# Altium PCB DCSupplyHub-v2_20231205a.PcbDoc
Units mm, origin at the board's own origin, x right, y up, seen from the top; angles counter-clockwise.
Board outline 81.6 x 57 mm, 2 copper layers (Top Layer, Bottom Layer), stack 1 mm thick; 112 components, 60 nets, 389 pads, 146 vias.
Unrouted connection lines stored in the file: 178.
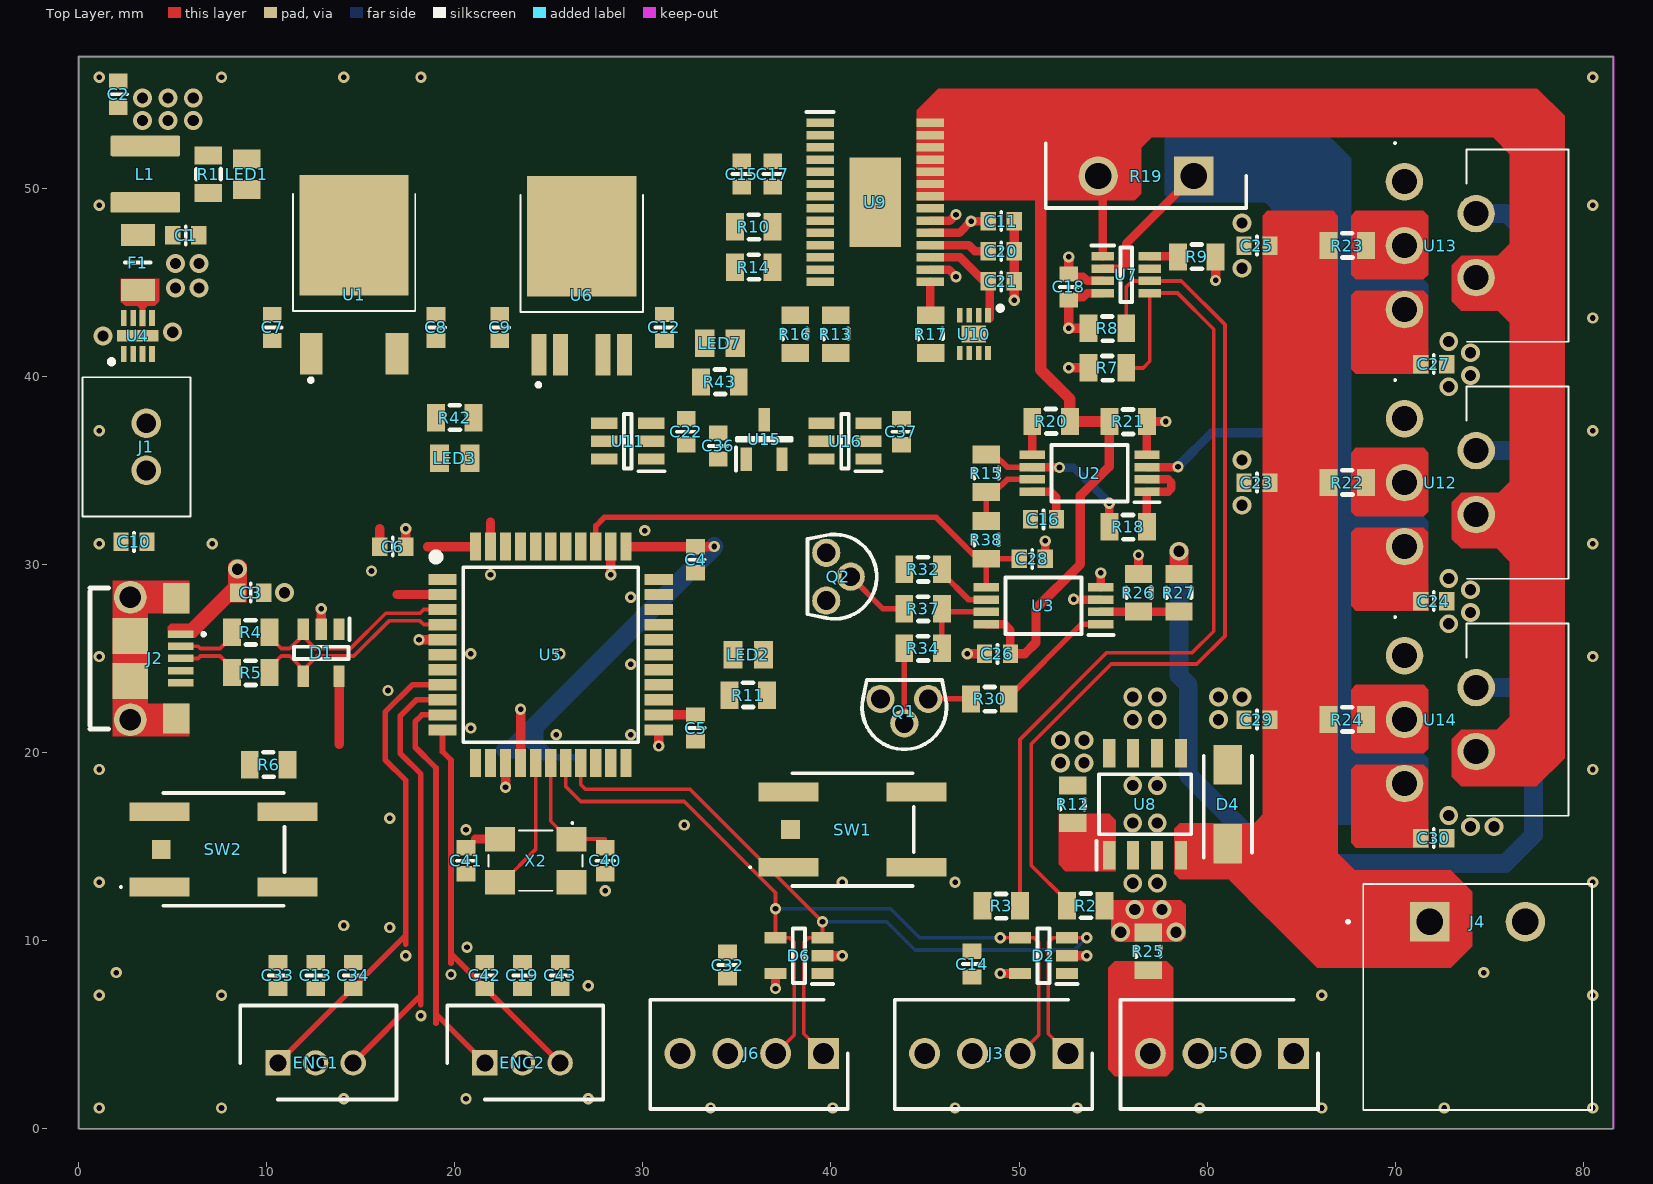
[diagram p0: Top Layer view]
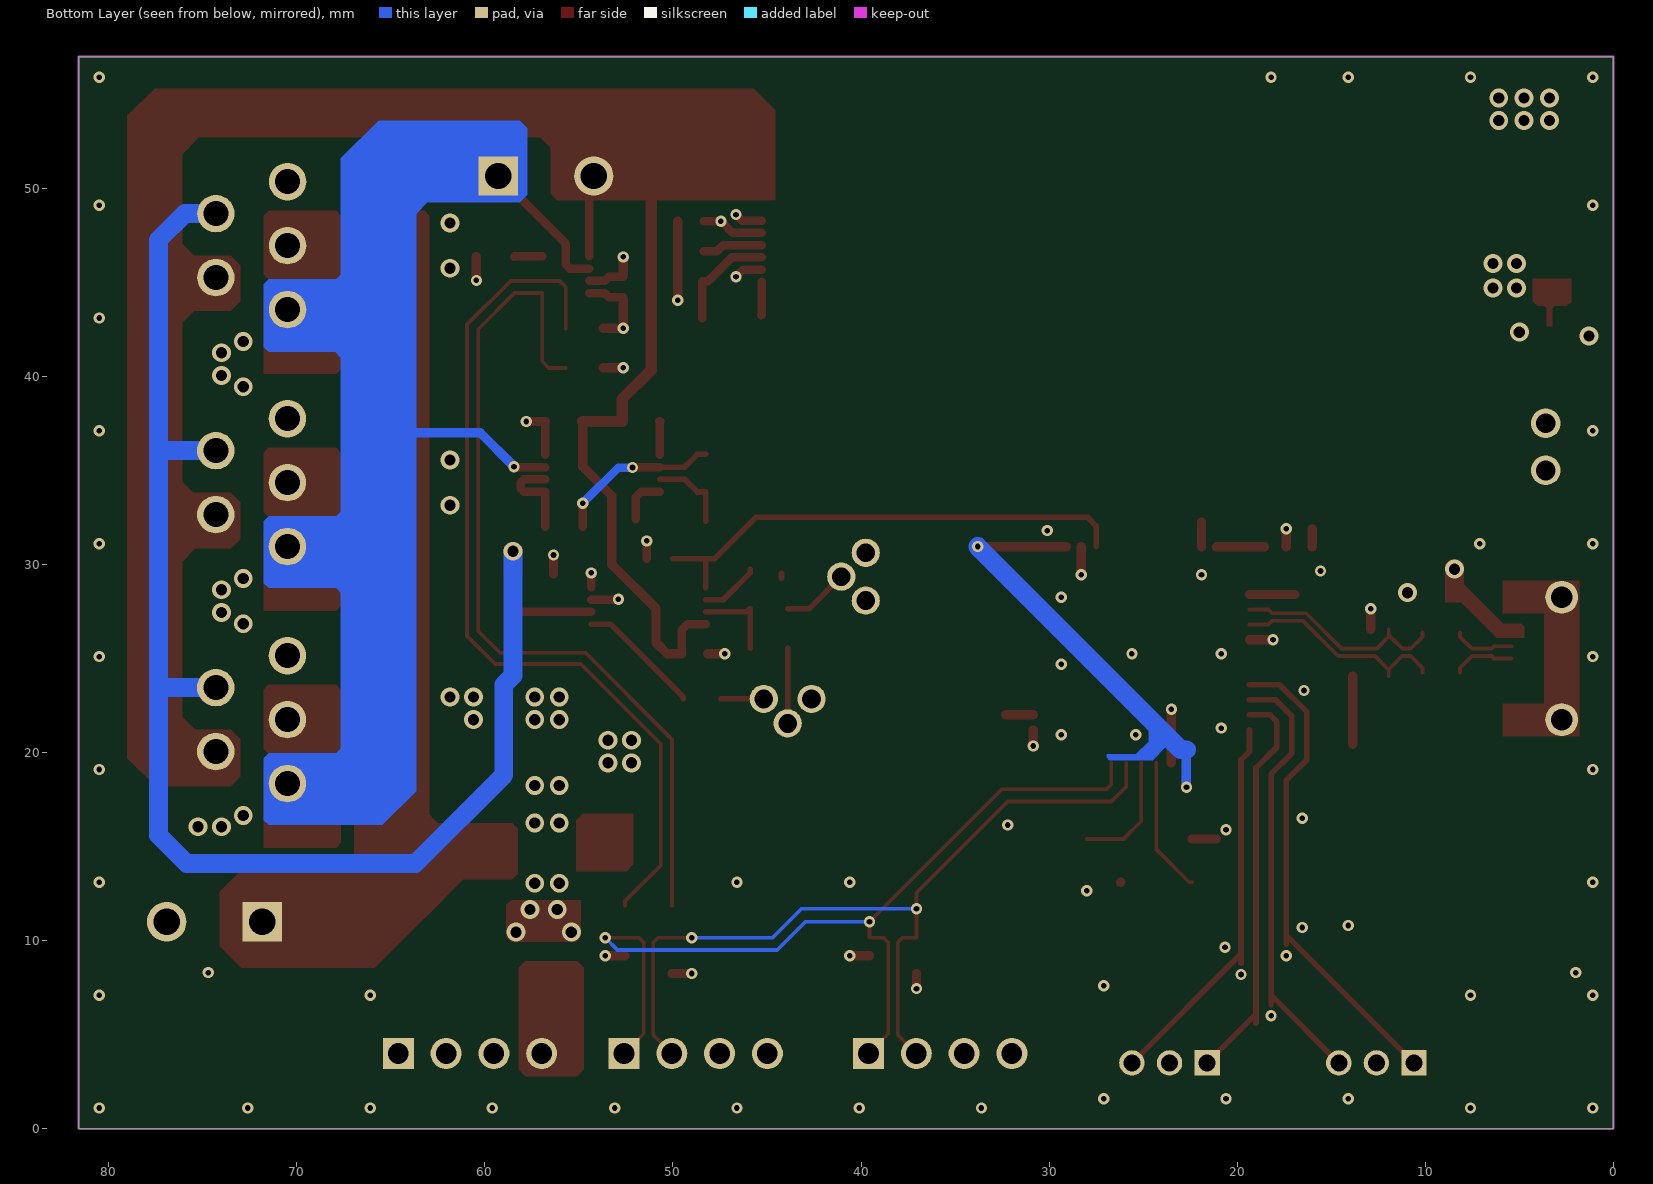
[diagram p1: Bottom Layer view, seen from below]

## Layer stack, top to bottom
Top Solder: solder mask 0.05, Solder Resist, Dk 4
Top Layer: signal copper 0.1
Dielectric 1: dielectric 0.8, FR-4, Dk 4.8
Bottom Layer: signal copper 0.1
Bottom Solder: solder mask 0.05, Solder Resist, Dk 4

## Board outline
0,0 81.6,0 81.6,57 0,57

## Design rules (kind name [scope] priority, off if disabled: settings)
AcuteAngle [All] p1: minimum=6.00000000000000E+0001 checktracksonly=FALSE
Clearance poly [InPolygon] p1: gap=0.3 ignorepadtopadclearanceinfootprint=TRUE
Clearance [All] p2: gap=0.2 ignorepadtopadclearanceinfootprint=TRUE
ComponentClearance [All] p1 off: gap=0.254 collisioncheckmode=3 verticalgap=0.254 showdistances=FALSE
HoleSize [All] p1: absolutevalues=TRUE maxlimit=20 minlimit=0.15 maxpercent=80.000 minpercent=20.000
MinimumAnnularRing [All] p1: minimumring=0.125
MinimumSolderMaskSliver [All] p1: minsoldermaskwidth=0.1
PlaneConnect [All] p1: planeconnectstyle=Direct reliefexpansion=0.508 reliefentries=4 reliefconductorwidth=0.254 reliefairgap=0.254
PolygonConnect [All] p1: connectstyle=Direct reliefconductorwidth=0.254 reliefentries=4 polygonreliefangle="90 Angle" airgapwidth=0.254
RoutingVias [All] p1: holewidth=0.3 width=0.6 viastyle="Through Hole" minholewidth=0.2 minwidth=0.45 maxholewidth=10 maxwidth=5
SMDNeckDown [All] p1 off: percent=50.000
SilkToSolderMaskClearance [IsPad] p1: minsilkscreentomaskgap=0 clearancetoexposedcopper=TRUE
SolderMaskExpansion [All] p1: expansion=0.05 istentingtop=FALSE
UnRoutedNet [All] p1: checkbadconnections=TRUE
Width [All] p1: maxlimit=5 minlimit=0.1 preferedwidth=0.2 bottomlayer_minwidth=0.15 minimp=50.000000 maximp=50.000000 favimp=50.000000
24 further rules are at their usual default settings.

## Classes and differential pairs
component class VCONV-DAC: C11 C15 C17 C20 C21 C22 C36 C37 R10 R13 R14 R16 R17 U9 U10 U11 U15 U16
component class PWM-DAC-PSU: C16 C18 C23 C24 C25 C26 C27 C28 C29 C30 D4 Q1 Q2 R7 R8 R9 R12 R15 R18 R19 R20 R21 R22 R23 R24 R26 R27 R30 R32 R34 R37 R38 U2 U3 U7 U8 U12 U13 U14
component class output&ext-modules: C13 C14 C19 C32 C33 C34 C42 C43 D2 D6 ENC1 ENC2 J3 J4 J5 J6 R25

## Components (designator, comment, footprint, x,y, rotation, side; value= is the part's Value field where it differs from the comment)
C1 "Cap" CAP_0603 5.7,47.5 r0 top value=100nF
C2 "Cap" CAP_0603 2.1,55 r90 top value=100nF
C3 "Cap" CAP_0603 9.15,28.5 r180 top value=100nF
C4 "Cap" CAP_0603 32.8,30.25 r90 top value=100nF
C5 "Cap" CAP_0603 32.8,21.3 r90 top value=100nF
C6 "Cap" CAP_0603 16.7,30.95 r0 top value=100nF
C7 "Cap" CAP_0603 10.3,42.6 r270 top value=100nF
C8 "Cap" CAP_0603 19,42.6 r90 top value=22uF
C9 "Cap" CAP_0603 22.4,42.6 r270 top value=100nF
C10 "Cap" CAP_0603 2.95,31.2 r180 top value=100nF
C11 "Cap" CAP_0603 49.05,48.25 r0 top value=10uF
C12 "Cap" CAP_0603 31.15,42.6 r270 top value=10uF
C13 "Cap" CAP_0603 12.6,8.15 r90 top value=100nF
C14 "Cap" CAP_0603 47.5,8.75 r90 top value=100nF
C15 "Cap" CAP_0603 35.25,50.75 r90 top value=10uF
C16 "Cap" CAP_0603 51.3,32.4 r180 top value=100nF
C17 "Cap" CAP_0603 36.9,50.75 r90 top value=10uF
C18 "Cap" CAP_0603 52.65,44.75 r90 top value=0.1uF
C19 "Cap" CAP_0603 23.6,8.15 r90 top value=100nF
C20 "Cap" CAP_0603 49.05,46.65 r0 top value=10uF
C21 "Cap" CAP_0603 49.05,45.05 r0 top value=2u2
C22 "Cap" CAP_0603 32.3,37.05 r270 top value=100nF
C23 "Cap" CAP_0603 62.65,34.35 r0 top value=10uF
C24 "Cap" CAP_0603 72.05,28.05 r0 top value=100nF
C25 "Cap" CAP_0603 62.65,46.95 r0 top value=10uF
C26 "Cap" CAP_0603 48.85,25.25 r0 top value=100nF
C27 "Cap" CAP_0603 72.05,40.65 r0 top value=100nF
C28 "Cap" CAP_0603 50.7,30.3 r0 top value=1uF
C29 "Cap" CAP_0603 62.65,21.75 r0 top value=10uF
C30 "Cap" CAP_0603 72.05,15.45 r0 top value=100nF
C32 "Cap" CAP_0603 34.5,8.7 r90 top value=100nF
C33 "Cap" CAP_0603 10.6,8.15 r90 top value=100nF
C34 "Cap" CAP_0603 14.6,8.15 r90 top value=100nF
C36 "Cap" CAP_0603 34,36.3 r90 top value=22uF
C37 "Cap" CAP_0603 43.75,37.05 r270 top value=100nF
C40 "Cap" CAP_0603 28,14.25 r90 top value=22pF
C41 "Cap" CAP_0603 20.6,14.25 r270 top value=22pF
C42 "Cap" CAP_0603 21.6,8.15 r90 top value=100nF
C43 "Cap" CAP_0603 25.6,8.15 r90 top value=100nF
D1 "CM1223-02SO" SOT95P280X145-5N 12.9,25.3 r270 top
D2 "CM1223-02SO" SOT95P280X145-5N 51.3,9.2 r180 top
D4 "SK33A_R3G" DIOM5126X250N 61.1,17.25 r90 top
D6 "CM1223-02SO" SOT95P280X145-5N 38.3,9.2 r180 top
ENC1 "440054-3" SHDR3W50P0X200_1X3_800X470X635P 10.6,3.5 r0 top
ENC2 "440054-3" SHDR3W50P0X200_1X3_800X470X635P 21.6,3.5 r0 top
F1 "0685P9500-01" FUSC3216X83N 3.15,46.05 r90 top
J1 "B2B-XH-2__LF__SN_" B2BXH2LFSN 3.6,35 r90 top
J2 "2013499-1" 2013499-1 0.6,25 r270 top
J3 "61900411121" SHDR4W64P0X254_1X4_1020X580X1175P 52.6,4 r180 top
J4 "1757242" 1757242 71.839,11 r0 top
J5 "61900411121" SHDR4W64P0X254_1X4_1020X580X1175P 64.6,4 r180 top
J6 "61900411121" SHDR4W64P0X254_1X4_1020X580X1175P 39.6,4 r180 top
L1 "74404042330" "WE-LQS 4018" 3.55,50.75 r90 top value=33µH
LED1 "Check Fuse" LED_SMD_0805_R 8.95,50.75 r270 top
LED2 "YELLOW" LED_SMD_0805_R 35.6,25.2 r180 top
LED3 "BLUE" LED_SMD_0805_R 20,35.65 r180 top
LED7 "GREEN" LED_SMD_0805_R 34.1,41.75 r180 top
Q1 "2N3904" LM431ACZ 43.9,22.2 r180 top
Q2 "2N3904" LM431ACZ 40.4,29.35 r270 top
R1 "Res1" RES_0805 6.9,50.75 r180 top value=18k
R2 "Res1" RES_0805 53.55,11.85 r270 top value=4.7k
R3 "Res1" RES_0805 49.05,11.85 r90 top value=4.7k
R4 "Res1" RES_0805 9.15,26.4 r90 top value=22R
R5 "Res1" RES_0805 9.15,24.25 r90 top value=22R
R6 "Res1" RES_0805 10.1,19.35 r270 top value=10k
R7 "Res1" RES_0805 54.7,40.45 r90 top value=10R
R8 "Res1" RES_0805 54.7,42.55 r90 top value=10R
R9 "Res1" RES_0805 59.45,46.35 r270 top value=10R
R10 "Res1" RES_0805 35.9,47.95 r90 top value=1.25k
R11 "Res1" RES_0805 35.6,23.05 r270 top value=65R
R12 "Res1" RES_0805 52.85,17.25 r0 top value=50R
R13 "Res1" RES_0805 40.25,42.25 r180 top value=240R
R14 "Res1" RES_0805 35.9,45.8 r270 top value=10k
R15 "Res1" RES_0805 48.25,34.85 r180 top value="18k 0.1%"
R16 "Res1" RES_0805 38.1,42.25 r0 top value=10k
R17 "Res1" RES_0805 45.3,42.25 r0 top value=33.3k
R18 "Res1" RES_0805 55.8,32 r90 top value="18k 0.1%"
R19 "PWR221T-30-1R00F" TO508P343X1041X1930-2P 56.75,50.65 r180 top
R20 "Res1" RES_0805 51.7,37.6 r270 top value="18k 0.1%"
R21 "Res1" RES_0805 55.8,37.6 r90 top value="18k 0.1%"
R22 "Res1" RES_0805 67.45,34.35 r270 top value=10mR
R23 "Res1" RES_0805 67.45,46.95 r270 top value=10mR
R24 "Res1" RES_0805 67.45,21.75 r270 top value=10mR
R25 "Res1" RES_0805 56.873,9.427 r0 top value=20R
R26 "Res1" RES_0805 56.35,28.5 r180 top value="1k 0.1%"
R27 "Res1" RES_0805 58.5,28.5 r0 top value="14k 0.1%"
R30 "Res1" RES_0805 48.45,22.85 r90 top value=1k
R32 "Res1" RES_0805 44.9,29.75 r90 top value=10k
R34 "Res1" RES_0805 44.9,25.55 r90 top value=1k
R37 "Res1" RES_0805 44.9,27.65 r90 top value=10k
R38 "Res1" RES_0805 48.25,31.3 r180 top value=1k
R42 "Res1" RES_0805 20,37.8 r270 top value=150R
R43 "Res1" RES_0805 34.1,39.7 r270 top value=65R
SW1 "EVQQ2D03W" EVQQ2D03W 41.15,15.9 r0 top
SW2 "EVQQ2D03W" EVQQ2D03W 7.7,14.85 r0 top
U1 "TLE4274DV50ATMA2" IPD90N06S4L03 14.65,44.7 r0 top
U2 "LM358FV-GE2" SOP65P640X135-8N 53.75,34.85 r180 top
U3 "LM358FV-GE2" SOP65P640X135-8N 51.3,27.8 r180 top
U4 "LTC4365CDDB#PBF" SON50P200X300X80-9N-D 3.15,42.15 r90 top
U5 "ATMEGA32U4-AU" QFP80P1200X1200X120-44N 25.1,25.2 r0 top
U6 "TLS850D0TEV33ATMA1" BTS6143D 26.75,44.55 r0 top
U7 "INA232BIDDFR" SOT65P280X110-8N 55.7,45.4 r0 top
U8 "LM334M_NOPB" SOIC127P600X175-8N 56.7,17.25 r90 top
U9 "LTC3649IFE#PBF" SOP65P640X120-29N 42.35,49.25 r0 top
U10 "MAX5395NATA+T" SON50P200X200X80-9N-D 47.6,42.25 r270 top
U11 "MCP4726" SOT95P270X145-6N 29.2,36.55 r180 top
U12 "LT3080ET#31PBF" LT3080ET31PBF 72.4,34.35 r270 top
U13 "LT3080ET#31PBF" LT3080ET31PBF 72.395,46.95 r270 top
U14 "LT3080ET#31PBF" LT3080ET31PBF 72.4,21.75 r270 top
U15 "MAX6018AEUR18+T" SOT95P237X112-3N 36.45,36.65 r90 top
U16 "MCP4726" SOT95P270X145-6N 40.75,36.55 r180 top
X2 "ABM3C-16.000MHZ-D4Y-T" ABM3C16000MHZD4YT 24.3,14.25 r180 top

## Footprints (in the part's own frame and the unit in brackets; to place one, negate y for a bottom-side part, rotate by r counter-clockwise, add the part's x,y. Pads: shape width x height; smd on the part's side, far side on the other; paste and mask are expansions set on the pad)
1757242 [mm]
  rect 2.1x2.1 hole 1.4: 1(0,0)
  round 2.1 hole 1.4: 2(5.08,0)
  silkscreen extent -4.4,-10 8.62,2, body extent -3.58,-10 8.58,2, height 8.89
2013499-1 [mm]
  rect 0.4x1.35 smd: 1(-1.3,4.825) 2(-0.65,4.825) 3(0,4.825) 4(0.65,4.825) 5(1.3,4.825)
  rect 1.6x1.4 smd: 6(-3.2,4.6) 7(3.2,4.6)
  rect 1.9x1.9 smd: 8(-1.2,2.15) 9(1.2,2.15)
  round 1.75 hole 1.15: 10(-3.255,2.15) 11(3.255,2.15)
  silkscreen extent -3.75,0 3.75,6.09, body extent -3.97,-0.56 4.03,5.04, height 2.68
ABM3C16000MHZD4YT [mm]
  rect 1.6x1.3 smd: 1(-1.9,-1.15) 2(1.9,-1.15) 3(1.9,1.15) 4(-1.9,1.15)
  silkscreen extent -2.5,-2.05 2.5,1.6, body extent -2.57,-1.67 2.57,1.67, height 1.4
B2BXH2LFSN [mm]
  round 1.575 hole 1.05: 1(0,0) 2(2.5,0)
  silkscreen extent -2.45,-2.35 4.95,3.4, body extent -2.45,-3.36 4.95,3.39, height 7.01
BTS6143D [mm]
  rect 0.8x2.2 smd: 1(-2.28,-3.4) 2(-1.14,-3.4) 4(1.14,-3.4) 5(2.28,-3.4)
  rect 5.8x6.4 smd: 3(0,2.9)
  silkscreen extent -3.25,-5.1 3.25,5.1, body extent -3.25,-4.49 3.25,5.49, height 2.45
CAP_0603 [mm]
  rect 0.81x0.99 smd: 1(-0.69,0) 2(0.69,0)
  silkscreen extent 0,-0.48 0,0.48, body extent -0.81,-0.41 0.81,0.41, height 0.95
DIOM5126X250N [mm]
  rect 2.1x1.5 smd: 1(-2.1,0) 2(2.1,0)
  silkscreen extent -2.85,-1.28 2.57,1.28, body extent -2.57,-1.28 2.57,1.28, height 2.5
EVQQ2D03W [mm]
  rect 3.2x1 smd: A1(-3.4,-2) A2(3.4,-2) B1(-3.4,2) B2(3.4,2)
  rect 1x1 smd: G1(-3.3,0)
  silkscreen extent -5.5,-3 3.25,3, body extent -3.3,-3 3.3,3, height 3.1
FUSC3216X83N [mm]
  rect 1.17x1.8 smd: 1(-1.47,0) 2(1.47,0)
  silkscreen extent 0,-0.69 0,0.69, body extent -1.6,-0.79 1.6,0.79, height 0.82
IPD90N06S4L03 [mm]
  rect 1.2x2.2 smd: 1(-2.28,-3.5) 3(2.28,-3.5)
  rect 5.8x6.4 smd: 2(0,2.8)
  silkscreen extent -3.25,-5 3.25,5, body extent -3.25,-4.47 3.25,5.48, height 2.3
LED_SMD_0805_R [mm]
  rect 1.02x1.47 smd: 1(-0.81,0) 2(0.81,0)
  body extent -1,-0.62 1,0.63, height 1.1
LM431ACZ [mm]
  round 1.5 hole 1: 1(-1.27,-0.65) 2(0,0.65) 3(1.27,-0.65)
  silkscreen extent -2.24,-1.65 2.24,2.03, body extent -2.66,-2.29 2.66,1.9, height 6.11
LT3080ET31PBF [mm]
  round 1.995 hole 1.33: 1(-3.4,-1.905) 2(-1.7,1.905) 3(0,-1.905) 4(1.7,1.905) 5(3.4,-1.905)
  silkscreen extent -5.5,-2.45 5.11,6.81, body extent -5.11,-2.47 5.11,6.81, height 15.85
QFP80P1200X1200X120-44N [mm]
  rect 1.5x0.6 smd: 1(-5.75,4) 2(-5.75,3.2) 3(-5.75,2.4) 4(-5.75,1.6) 5(-5.75,0.8) 6(-5.75,0) 7(-5.75,-0.8) 8(-5.75,-1.6) 9(-5.75,-2.4) 10(-5.75,-3.2) 11(-5.75,-4) 23(5.75,-4) 24(5.75,-3.2) 25(5.75,-2.4) 26(5.75,-1.6) 27(5.75,-0.8) 28(5.75,0) 29(5.75,0.8) 30(5.75,1.6) 31(5.75,2.4) 32(5.75,3.2) 33(5.75,4)
  rect 0.6x1.5 smd: 12(-4,-5.75) 13(-3.2,-5.75) 14(-2.4,-5.75) 15(-1.6,-5.75) 16(-0.8,-5.75) 17(0,-5.75) 18(0.8,-5.75) 19(1.6,-5.75) 20(2.4,-5.75) 21(3.2,-5.75) 22(4,-5.75) 34(4,5.75) 35(3.2,5.75) 36(2.4,5.75) 37(1.6,5.75) 38(0.8,5.75) 39(0,5.75) 40(-0.8,5.75) 41(-1.6,5.75) 42(-2.4,5.75) 43(-3.2,5.75) 44(-4,5.75)
  silkscreen extent -6.3,-4.65 4.65,5.4, body extent -6,-6 6,6, height 1.2
RES_0805 [mm]
  rect 1.45x0.95 smd: 1(0,-1) 2(0,1)
  silkscreen extent -0.66,-0.27 0.64,0.27, body extent -0.63,-1.02 0.63,1.03, height 0.5
SHDR3W50P0X200_1X3_800X470X635P [mm]
  rect 1.35x1.35 hole 0.9: 1(0,0)
  round 1.35 hole 0.9: 2(2,0) 3(4,0)
  silkscreen extent -2,-1.95 6.3,3.05, body extent -1.91,-1.6 6.09,3.1, height 6.05
SHDR4W64P0X254_1X4_1020X580X1175P [mm]
  rect 1.65x1.65 hole 1.1: 1(0,0)
  round 1.65 hole 1.1: 2(2.54,0) 3(5.08,0) 4(7.62,0)
  silkscreen extent -1.29,-2.85 9.21,2.95, body extent -1.29,-2.9 8.91,2.9, height 11.75
SOIC127P600X175-8N [mm]
  rect 1.525x0.65 smd: 1(-2.712,1.905) 2(-2.712,0.635) 3(-2.712,-0.635) 4(-2.712,-1.905) 5(2.712,-1.905) 6(2.712,-0.635) 7(2.712,0.635) 8(2.712,1.905)
  silkscreen extent -3.47,-2.45 1.6,2.58, body extent -3,-2.45 3,2.45, height 1.75
SON50P200X200X80-9N-D [mm]
  rect 0.75x0.3 smd: 1(-1,0.75) 2(-1,0.25) 3(-1,-0.25) 4(-1,-0.75) 5(1,-0.75) 6(1,-0.25) 7(1,0.25) 8(1,0.75)
  rect 0.9x1.3 smd: 9(0,0)
  silkscreen extent -1.5,1.28 -1.25,1.53, body extent -1.05,-1 1.05,1, height 0.8
SON50P200X300X80-9N-D [mm]
  rect 0.85x0.3 smd: 1(-0.95,0.75) 2(-0.95,0.25) 3(-0.95,-0.25) 4(-0.95,-0.75) 5(0.95,-0.75) 6(0.95,-0.25) 7(0.95,0.25) 8(0.95,0.75)
  rect 0.61x2.2 smd: 9(0,0)
  silkscreen extent -1.5,1.27 -1.25,1.52, body extent -1.05,-1.5 1.05,1.5, height 0.8
SOP65P640X120-29N [mm]
  rect 1.45x0.45 smd: 1(-2.925,4.225) 2(-2.925,3.575) 3(-2.925,2.925) 4(-2.925,2.275) 5(-2.925,1.625) 6(-2.925,0.975) 7(-2.925,0.325) 8(-2.925,-0.325) 9(-2.925,-0.975) 10(-2.925,-1.625) 11(-2.925,-2.275) 12(-2.925,-2.925) 13(-2.925,-3.575) 14(-2.925,-4.225) 15(2.925,-4.225) 16(2.925,-3.575) 17(2.925,-2.925) 18(2.925,-2.275) 19(2.925,-1.625) 20(2.925,-0.975) 21(2.925,-0.325) 22(2.925,0.325) 23(2.925,0.975) 24(2.925,1.625) 25(2.925,2.275) 26(2.925,2.925) 27(2.925,3.575) 28(2.925,4.225)
  rect 2.74x4.75 smd: 29(0,0)
  silkscreen extent -3.65,4.8 -2.2,4.8, body extent -3.2,-4.85 3.2,4.85, height 1.2
SOP65P640X135-8N [mm]
  rect 1.35x0.45 smd: 1(-3.05,0.975) 2(-3.05,0.325) 3(-3.05,-0.325) 4(-3.05,-0.975) 5(3.05,-0.975) 6(3.05,-0.325) 7(3.05,0.325) 8(3.05,0.975)
  silkscreen extent -3.72,-1.5 2.03,1.55, body extent -3.2,-1.5 3.2,1.5, height 1.35
SOT65P280X110-8N [mm]
  rect 1.2x0.45 smd: 1(-1.25,0.975) 2(-1.25,0.325) 3(-1.25,-0.325) 4(-1.25,-0.975) 5(1.25,-0.975) 6(1.25,-0.325) 7(1.25,0.325) 8(1.25,0.975)
  silkscreen extent -1.85,-1.45 0.3,1.55, body extent -1.4,-1.45 1.4,1.45, height 1.1
SOT95P237X112-3N [mm]
  rect 1.25x0.6 smd: 1(-1.05,0.95) 2(-1.05,-0.95) 3(1.05,0)
  silkscreen extent -1.68,-1.46 0.08,1.5, body extent -1.27,-1.46 1.27,1.46, height 1
SOT95P270X145-6N [mm]
  rect 1.4x0.6 smd: 1(-1.25,0.95) 2(-1.25,0) 3(-1.25,-0.95) 4(1.25,-0.95) 5(1.25,0) 6(1.25,0.95)
  silkscreen extent -1.95,-1.45 0.2,1.6, body extent -1.35,-1.45 1.35,1.45, height 1.45
SOT95P280X145-5N [mm]
  rect 1.15x0.6 smd: 1(-1.25,0.95) 2(-1.25,0) 3(-1.25,-0.95) 4(1.25,-0.95) 5(1.25,0.95)
  silkscreen extent -1.83,-1.45 0.33,1.5, body extent -1.4,-1.45 1.4,1.45, height 1.45
TO508P343X1041X1930-2P [mm]
  rect 2.085x2.085 hole 1.39: 1(-2.54,0)
  round 2.085 hole 1.39: 2(2.54,0)
  silkscreen extent -5.33,-1.73 5.33,1.7, body extent -5.21,-1.73 5.21,1.7, height 18.8
"WE-LQS 4018" [mm] "SMD Power Inductor, 2-Leads, Body 4.0x4.0mm"
  rrect15% 1.1x3.7 smd: 1(-1.5,0) 2(1.5,0)
  body extent -2,-2 2,2, height 1.78

## Part data
C1 C2 C3 C4 C5 C6 C7 C8 C9 C10 C11 C12 C13 C14 C15 C16 C17 C18 C19 C20 C21 C22 C23 C24 C25 C26 C27 C28 C29 C30 C32 C33 C34 C36 C37 C40 C41 C42 C43: "Capacitor", LatestRevisionDate=17-Jul-2002, LatestRevisionNote="Re-released for DXP Platform.", PackageDescription="Radial Cap, Thru-Hole; 2 Leads; 0.3 in Pin Spacing", PackageReference=RAD-0.3, Published=8-Jun-2000, Publisher="Altium Limited"
D1 D2 D6: "TVS Diode (Uni-directional)", Manufacturer_Name=onsemi, Mouser Part Number=748-CM1223-02SO, ComponentLink1Description=Datasheet, ComponentLink1URL=https://www.onsemi.com/pdf/datasheet/cm1223-d.pdf, Datasheet Link=https://www.onsemi.com/pdf/datasheet/cm1223-d.pdf, Height=1.45mm, Manufacturer_Part_Number=CM1223-02SO, Mouser Price/Stock=https://www.mouser.co.uk/ProductDetail/onsemi/CM1223-02SO?qs=lLuKAerq7nnvVg3rEtIojA%3D%3D
D4: "Schottky Diode", Manufacturer_Name="Taiwan Semiconductor", Manufacturer_Part_Number="SK33A R3G", Mouser Part Number=821-SK33AR3G, Datasheet Link=https://eu.mouser.com/datasheet/2/395/SK32A%20SERIES_T1705-1140381.pdf, Height=2.5mm, Mouser Price/Stock=https://www.mouser.co.uk/ProductDetail/Taiwan-Semiconductor/SK33A-R3G?qs=u4fy%2FsgLU9MRgnm6RX6lAA%3D%3D
ENC1 ENC2: "Connector", Manufacturer_Name="TE Connectivity", Mouser Part Number=571-440054-3, Arrow Part Number=440054-3, Arrow Price/Stock=https://www.arrow.com/en/products/440054-3/te-connectivity?region=nac, ComponentLink1Description="Encoder Datasheet", ComponentLink1URL=https://www.farnell.com/datasheets/3750970.pdf, Datasheet Link=https://www.te.com/commerce/DocumentDelivery/DDEController?Action=srchrtrv&DocNm=440054&DocType=Customer+Drawing&DocLang=English&DocFormat=pdf&PartCntxt=440054-3, Height=6.35mm, Manufacturer_Part_Number=440054-3, Mouser Price/Stock=https://www.mouser.co.uk/ProductDetail/TE-Connectivity/440054-3?qs=JFPmFzpscO5ATC%252BmN3ka1Q%3D%3D
F1: "Fuse Chip Fast Acting 50A 32V SMD Solder Pad 1206 3.2 X 1.58 X 0.63mm Ceramic T/R", Manufacturer_Name="Bel Circuit Protection", Arrow Part Number=0685P9500-01, Arrow Price/Stock=https://www.arrow.com/en/products/0685p9500-01/bel-group?region=europe, Datasheet Link=https://www.arrow.com/en/products/0685p9500-01/bel-group, Geometry.Height=0.83mm, Manufacturer_Part_Number=0685P9500-01
J1: "Connector", Arrow Part Number="B2B-XH-2 (LF)(SN)", Manufacturer_Name="JST (JAPAN SOLDERLESS TERMINALS)", Arrow Price/Stock=https://www.arrow.com/en/products/b2b-xh-2-lf-sn/jst-manufacturing?region=europe, Datasheet Link=http://uk.rs-online.com/web/p/products/1755297, Height=7mm, Manufacturer_Part_Number="B2B-XH-2 (LF)(SN)"
J2: "Connector", Manufacturer_Name="TE Connectivity", Mouser Part Number=571-2013499-1, Arrow Part Number=2013499-1, Arrow Price/Stock=https://www.arrow.com/en/products/2013499-1/te-connectivity?region=nac, ComponentLink1Description=Datasheet, ComponentLink1URL=https://cdn.amphenol-cs.com/media/wysiwyg/files/documentation/datasheet/inputoutput/io_usb_micro.pdf, Datasheet Link=http://www.te.com/commerce/DocumentDelivery/DDEController?Action=showdoc&DocId=Customer+Drawing%7F2013499%7FB2%7Fpdf%7FEnglish%7FENG_CD_2013499_B2.pdf%7F2013499-1, Manufacturer_Part_Number=2013499-1, Mouser Price/Stock=https://www.mouser.co.uk/ProductDetail/TE-Connectivity/2013499-1?qs=TL6PIybY3BOLK37GbUYdng%3D%3D
J3 J5 J6: "Connector", Manufacturer_Name="Wurth Elektronik", Mouser Part Number=710-61900411121, Datasheet Link=https://katalog.we-online.de/em/datasheet/6190xx11121.pdf, Height=11.75mm, Manufacturer_Part_Number=61900411121, Mouser Price/Stock=https://www.mouser.co.uk/ProductDetail/Wurth-Elektronik/61900411121?qs=W%252B2sBeLta1Z79%252BA04MeSCQ%3D%3D
  J3 J6: ComponentLink1Description="LCD Datasheet", ComponentLink1URL=https://www.farnell.com/datasheets/3708797.pdf
  J5: ComponentLink1Description="USB A", ComponentLink1URL=https://www.te.com/usa-en/product-1932258-1.datasheet.pdf
J4: "Connector", Manufacturer_Name="Phoenix Contact", Mouser Part Number=651-1757242, Arrow Part Number=1757242, Arrow Price/Stock=https://www.arrow.com/en/products/1757242/phoenix-contact?region=nac, ComponentLink1Description=Datasheet, ComponentLink1URL=http://www.phoenixcontact.com/de/produkte/1757242/pdf, Datasheet Link=http://www.phoenixcontact.com/de/produkte/1757242/pdf, Height=8.72mm, Manufacturer_Part_Number=1757242, Mouser Price/Stock=https://www.mouser.co.uk/ProductDetail/Phoenix-Contact/1757242?qs=uD%2FdkN7XIa3Ejiz9qDxlzw%3D%3D
L1: library part CMP-006-00018-3, "WE-LQS SMD Power Inductor, L=33 µH", Tolerance=20%, ComponentLink1Description="Manufacturer URL", ComponentLink1URL=http://www.we-online.com, ComponentLink2Description=Datasheet, ComponentLink2URL=http://katalog.we-online.de/pbs/datasheet/74404042330.pdf, Pins=2
LED1 LED2 LED3 LED7: library part LED2, "Typical RED, GREEN, YELLOW, AMBER GaAs LED", LatestRevisionDate=17-Jul-2002, LatestRevisionNote="Re-released for DXP Platform.", PackageDescription="SM LED; 2 Flat Leads", PackageReference=3.2X1.6X1.1, PackageVersion=Feb-2002, Published=8-Jun-2000, Publisher="Altium Limited"
Q1 Q2: library part 2N3904BU, "Transistor BJT NPN", Manufacturer_Name=onsemi, Mouser Part Number=512-2N3904BU, Arrow Part Number=2N3904BU, Arrow Price/Stock=https://www.arrow.com/en/products/2n3904bu/on-semiconductor?region=europe, ComponentLink1Description=Datasheet, ComponentLink1URL=http://www.onsemi.com/pub/Collateral/2N3904-D.pdf, Datasheet Link=http://www.onsemi.com/pub/Collateral/2N3904-D.pdf, Height=5.33mm, Manufacturer_Part_Number=2N3904BU, Mouser Price/Stock=https://www.mouser.co.uk/ProductDetail/onsemi-Fairchild/2N3904BU?qs=or4AE2qAS%252Bd0Jdpn%2F8ktKg%3D%3D
R1 R2 R3 R4 R5 R6 R7 R8 R9 R10 R11 R12 R13 R14 R15 R16 R17 R18 R20 R21 R22 R23 R24 R25 R26 R27 R30 R32 R34 R37 R38 R42 R43: "Resistor", LatestRevisionDate=17-Jul-2002, LatestRevisionNote="Re-released for DXP Platform.", PackageDescription="Axial Device, Thru-Hole; 2 Leads; 0.3 in Pin Spacing", PackageReference=AXIAL-0.3, Published=8-Jun-2000, Publisher="Altium Limited"
R19: "Shunt resistor", Manufacturer_Name=Bourns, Mouser Part Number=652-PWR221T-30-1R00F, Arrow Part Number=PWR221T-30-1R00F, Arrow Price/Stock=https://www.arrow.com/en/products/pwr221t-30-1r00f/bourns, ComponentLink1Description=Datasheet, ComponentLink1URL=https://www.mouser.com/datasheet/2/54/pwr221t-30-777826.pdf, Datasheet Link=https://www.mouser.com/datasheet/2/54/pwr221t-30-777826.pdf, Height=3.43mm, Manufacturer_Part_Number=PWR221T-30-1R00F, Mouser Price/Stock=https://www.mouser.co.uk/ProductDetail/Bourns/PWR221T-30-1R00F?qs=XYAu1o%252BHdOJGOBAldPrG1w%3D%3D
SW1 SW2: library part SW-SPST-2_C, "FSMSM Push Button Switch, 50 mA, -35 to 85 degC, 2-Pin SMD, RoHS, Tape and Reel", Case\/Package=SMD/SMT, Contact Current Rating=50mA, Contact Resistance=100mOhm, Manufacturer="TE Connectivity", Max Operating Temperature=85degC, Max Voltage Rating (DC)=12V, Min Operating Temperature=-35degC, Operating Force=180gf, Package Description="2-Pin Surface Mount Device, Body 6 x 3.5 mm, Pitch 9.19 mm", Package Quantity=1800, Package Reference=FSMSMTR, Voltage Rating (DC)=24V, Actuator Length=1.07mm, Actuator Material=Polyamide, ComponentLink1Description=Datasheet, ComponentLink1URL=https://www.farnell.com/datasheets/2244072.pdf, Contact Material=Brass, Contact Plating=Silver, Current Rating=50mA, Datasheet URL=http://www.te.com/commerce/DocumentDelivery/DDEController?Action=showdoc&DocId=Customer+Drawing%7F1437566-3%7FC2%7Fpdf%7FEnglish%7FENG_CD_1437566-3_C2_1437566_3_1_c.dwg.pdf%7F1437566-4, Datasheet Version="Rev. C2, 08/2014", Electrical Life=20000Cycles, ELV=Compliant, Illumination Type=Illuminated, Lead Free=LeadFree, Manufacturer URL=http://www.te.com/, Mechanical Life=20000Cycles, Mount=SurfaceMount, Mounting Technology=SurfaceMount, Orientation=Straight, Packaging=TapeandReel, REACH SVHC=Unknown, RoHSCompliant=true, Switch Travel=0.25mm, Termination=GullWing, Throw Configuration=SPST
U1: "LDO, FIXED, 5V, 0.4A, -40 TO 150DEG C", Manufacturer_Name=Infineon, Mouser Part Number=726-TLE4274DV50ATMA2, Arrow Part Number=TLE4274DV50ATMA2, Arrow Price/Stock=https://www.arrow.com/en/products/tle4274dv50atma2/infineon-technologies-ag?region=nac, ComponentLink1Description=Datasheet, ComponentLink1URL=https://www.mouser.com/datasheet/2/196/Infineon-TLE4274-DS-v01_70-EN-1133217.pdf, Datasheet Link=https://www.mouser.com/datasheet/2/196/Infineon-TLE4274-DS-v01_70-EN-1133217.pdf, Height=2mm, Manufacturer_Part_Number=TLE4274DV50ATMA2, Mouser Price/Stock=https://www.mouser.co.uk/ProductDetail/Infineon-Technologies/TLE4274DV50ATMA2/?qs=IxCaM9nJKKWmxkR9ksyK2Q%3D%3D
U2: library part TI-LM358-8, "l Operational Amplifier", ComponentLink1Description=Datasheet, ComponentLink1URL=https://www.ti.com/lit/ds/symlink/lm358.pdf?ts=1699359399522&ref_url=https%253A%252F%252Fwww.ti.com%252Fproduct%252FLM358%253Futm_source%253Dgoogle%2526utm_medium%253Dcpc%2526utm_campaign%253Dasc-null-null-GPN_EN-cpc-evm-google-wwe_cons%2526utm_content%253DLM358%2526ds_k%253DLM358%2BDatasheet%2526DCM%253Dyes%2526gclid%253DEAIaIQobChMI5uKEhe-xggMVJz4GAB1MywkTEAAYASAAEgJG8PD_BwE%2526gclsrc%253Daw.ds
U3: library part TI-LM358-8, "l Operational Amplifier", Supplier Part Number 1=1716341, ComponentLink1Description=Datasheet, ComponentLink1URL=https://www.ti.com/lit/ds/symlink/lm358.pdf?ts=1699359399522&ref_url=https%253A%252F%252Fwww.ti.com%252Fproduct%252FLM358%253Futm_source%253Dgoogle%2526utm_medium%253Dcpc%2526utm_campaign%253Dasc-null-null-GPN_EN-cpc-evm-google-wwe_cons%2526utm_content%253DLM358%2526ds_k%253DLM358%2BDatasheet%2526DCM%253Dyes%2526gclid%253DEAIaIQobChMI5uKEhe-xggMVJz4GAB1MywkTEAAYASAAEgJG8PD_BwE%2526gclsrc%253Daw.ds, Supplier 1=Rs
U4: "vervoltage, Undervoltage and Reverse Supply Protection Controller", Manufacturer_Name="Analog Devices", Mouser Part Number=584-LTC4365CDDB#PBF, ComponentLink1Description=Datasheet, ComponentLink1URL=https://www.analog.com/media/en/technical-documentation/data-sheets/LTC4365.pdf, Datasheet Link=http://cds.linear.com/docs/en/datasheet/4365fa.pdf, Height=0.8mm, Manufacturer_Part_Number=LTC4365CDDB#PBF, Mouser Price/Stock=https://www.mouser.com/Search/Refine.aspx?Keyword=584-LTC4365CDDB%23PBF
U5: "MCU AVR 32K FLASH 16MHZ 44-TQFP Atmel ATMEGA32U4-AU, 8bit AVR Microcontroller, 16MHz, 1 kB, 32 kB Flash, 44-Pin TQFP", Manufacturer_Name=Microchip, Mouser Part Number=556-ATMEGA32U4-AU, Arrow Part Number=ATMEGA32U4-AU, Arrow Price/Stock=https://www.arrow.com/en/products/atmega32u4-au/microchip-technology?region=nac, ComponentLink1Description=Datasheet, ComponentLink1URL=https://ww1.microchip.com/downloads/en/DeviceDoc/Atmel-7766-8-bit-AVR-ATmega16U4-32U4_Datasheet.pdf, Datasheet Link=http://www.atmel.com/images/atmel-7766-8-bit-avr-atmega16u4-32u4_summary.pdf, Geometry.Height=1.2mm, Manufacturer_Part_Number=ATMEGA32U4-AU, Mouser Price/Stock=https://www.mouser.co.uk/ProductDetail/Microchip-Technology/ATMEGA32U4-AU?qs=SSucg2PyLi7mKWjHIsNJ3w%3D%3D
U6: "LDO VOltage regulator", Manufacturer_Name=Infineon, Mouser Part Number=726-TLS850D0TEV33ATM, Arrow Part Number=TLS850D0TEV33ATMA1, Arrow Price/Stock=https://www.arrow.com/en/products/tls850d0tev33atma1/infineon-technologies-ag, ComponentLink1Description=Datasheet, ComponentLink1URL=https://4donline.ihs.com/images/VipMasterIC/IC/INFN/INFN-S-A0003268371/INFN-S-A0003268371-1.pdf?hkey=6D3A4C79FDBF58556ACFDE234799DDF0, Datasheet Link=https://www.arrow.com/en/products/tls850d0tev33atma1/infineon-technologies-ag, Height=2mm, Manufacturer_Part_Number=TLS850D0TEV33ATMA1, Mouser Price/Stock=https://www.mouser.co.uk/ProductDetail/Infineon-Technologies/TLS850D0TEV33ATMA1?qs=lJkB7%252BtQNiOAXKJxyf22ag%3D%3D
U7: "INA232 48-V, 16-Bit, Current, Voltage, and Power Monitor With an I2C Interface", Manufacturer_Name="Texas Instruments", Mouser Part Number=595-INA232BIDDFR, ComponentLink1Description=Datahseet, ComponentLink1URL=https://www.ti.com/lit/ds/symlink/ina232.pdf?HQS=dis-mous-null-mousermode-dsf-pf-null-wwe&ts=1700934645658&ref_url=https%253A%252F%252Fwww.mouser.com%252F, Datasheet Link=https://www.ti.com/lit/ds/symlink/ina232.pdf?ts=1699312390876&ref_url=https%253A%252F%252Fwww.ti.com%252Fproduct%252FINA232%253Futm_source%253Dgoogle%2526utm_medium%253Dcpc%2526utm_campaign%253Dasc-null-null-GPN_EN-cpc-pf-google-wwe_cons%2526utm_content%2, Height=1.1mm, Manufacturer_Part_Number=INA232BIDDFR, Mouser Price/Stock=https://www.mouser.co.uk/ProductDetail/Texas-Instruments/INA232BIDDFR?qs=17ckDYBRdelmwH1njZdaQw%3D%3D
U8: "3-Terminal Adjustable Current Source", Arrow Part Number=LM334M/NOPB, Manufacturer_Name="Texas Instruments", Mouser Part Number=926-LM334M/NOPB, Arrow Price/Stock=https://www.arrow.com/en/products/lm334mnopb/texas-instruments?region=nac, ComponentLink1Description=Datasheet, ComponentLink1URL=https://www.ti.com/lit/ds/symlink/lm134.pdf?ts=1700986476311&ref_url=https%253A%252F%252Fwww.google.com%252F, Datasheet Link=http://www.ti.com/lit/ds/symlink/lm334.pdf, Height=1.75mm, Manufacturer_Part_Number=LM334M/NOPB, Mouser Price/Stock=https://www.mouser.co.uk/ProductDetail/Texas-Instruments/LM334M-NOPB?qs=X1J7HmVL2ZGVqL5LPYoDQw%3D%3D
U9: "60V, 4A Synchronous Step-Down Regulator with Rail-to-Rail Programmable Output", Manufacturer_Name="Analog Devices", Mouser Part Number=584-LTC3649IFE#PBF, Supplier Part Number 1=LTC3649IFE#PBF-ND, Arrow Part Number=LTC3649IFE#PBF, Arrow Price/Stock=https://www.arrow.com/en/products/ltc3649ifepbf/linear-technology, ComponentLink1Description=Datasheet, ComponentLink1URL=https://www.analog.com/media/en/technical-documentation/data-sheets/3649fb.pdf, Datasheet Link=http://www.analog.com/media/en/technical-documentation/data-sheets/3649fb.pdf, Geometry.Height=1.2mm, Manufacturer_Part_Number=LTC3649IFE#PBF, Mouser Price/Stock=https://www.mouser.co.uk/ProductDetail/Analog-Devices/LTC3649IFEPBF?qs=oahfZPh6IALghjzowGYuFA%3D%3D, Supplier 1=Digi-Key
U10: "ingle, 256-Tap Volatile, I2C, Low-Voltage Linear / Taper Digital Potentiometer", Manufacturer_Name="Analog Devices", Mouser Part Number=700-MAX5395NATA+T, ComponentLink1Description=Datasheet, ComponentLink1URL=https://www.farnell.com/datasheets/2297485.pdf, Datasheet Link=https://datasheets.maximintegrated.com/en/ds/MAX5395.pdf, Height=0.8mm, Manufacturer_Part_Number=MAX5395NATA+T, Mouser Price/Stock=https://www.mouser.co.uk/ProductDetail/Analog-Devices-Maxim-Integrated/MAX5395NATA%2bT?qs=0JU57JYmZjt6U4d8%252BEwekw%3D%3D
U11 U16: library part MCP4725A0T-E_CH, "12-Bit Digital-to-Analog Converter with EEPROM Memory", Arrow Part Number=MCP4725A0T-E/CH, Manufacturer_Name=Microchip, Mouser Part Number=579-MCP4725A0TECH, Arrow Price/Stock=https://www.arrow.com/en/products/mcp4725a0t-ech/microchip-technology?region=nac, ComponentLink1Description=Datasheet, ComponentLink1URL=http://ww1.microchip.com/downloads/en/DeviceDoc/22039d.pdf, Datasheet Link=http://ww1.microchip.com/downloads/en/DeviceDoc/22039d.pdf, Height=1.45mm, Manufacturer_Part_Number=MCP4725A0T-E/CH, Mouser Price/Stock=https://www.mouser.co.uk/ProductDetail/Microchip-Technology/MCP4725A0T-E-CH?qs=vkMqrgFpRajeQECZ3goc0A%3D%3D
U12 U13 U14: "Adjustable 1.1A Single Resistor Low Dropout Regulator", Manufacturer_Name="Analog Devices", Mouser Part Number=584-LT3080ET#31PBF, Arrow Part Number=LT3080ET#31PBF, Arrow Price/Stock=https://www.arrow.com/en/products/lt3080et31pbf/analog-devices?region=nac, ComponentLink1Description=Datasheet, ComponentLink1URL=https://www.analog.com/media/en/technical-documentation/data-sheets/lt3080.pdf, Datasheet Link=https://www.analog.com/media/en/technical-documentation/data-sheets/3080fc.pdf, Height=15.748mm, Manufacturer_Part_Number=LT3080ET#31PBF, Mouser Price/Stock=https://www.mouser.co.uk/ProductDetail/Analog-Devices/LT3080ET31PBF?qs=hVkxg5c3xu%252BqtsodQH9qig%3D%3D
U15: "Precision, Micropower, 1.8V Supply, / Low-Dropout, SOT23 Voltage Reference", Manufacturer_Name="Analog Devices", Mouser Part Number=700-MAX6018AEUR18T, ComponentLink1Description=Datasheet, ComponentLink1URL=https://datasheets.maximintegrated.com/en/ds/MAX6018-MAX6018B.pdf, Datasheet Link=https://datasheets.maximintegrated.com/en/ds/MAX6018-MAX6018B.pdf, Height=1.12mm, Manufacturer_Part_Number=MAX6018AEUR18+T, Mouser Price/Stock=https://www.mouser.co.uk/ProductDetail/Maxim-Integrated/MAX6018AEUR18%2bT?qs=GxOUx7aO6nxTHpj7gtPQaw%3D%3D
X2: "16MHz Â±30ppm Crystal 18pF 50 Ohms 4-SMD, No Lead", Package="SMD-4 Abracon", Availability=Unavailable, ComponentLink1Description=Datasheet, ComponentLink1URL=https://www.mouser.ee/datasheet/2/3/abm3c-1775120.pdf, MF=Abracon, MP=ABM3C-16.000MHZ-D4Y-T, Price=None, SnapEDA_Link=https://www.snapeda.com/parts/ABM3C-16.000MHZ-D4Y-T/Abracon%20LLC/view-part/463692/?ref=snap, Supplier 1="Arrow Electronics", Supplier Part Number 1=ABM3C-16.000MHZ-D4Y-T

## Via types
v1: diameter 0.6, hole 0.3, Top Layer to Bottom Layer, 95 vias
v2: diameter 1, hole 0.6, Top Layer to Bottom Layer, 51 vias

## Nets (pads, with @x,y where several pads share a name; then routed paths per layer and width w, separated by ;. In a path a pad name is that pad's centre, name@x,y a point inside that pad or via, vN(x,y) a via of type N, cw(c..) or ccw(c..) an arc to the next point about the centre after c; other vN are vias at no path point)
3.3V: C12.2 C22.1 C36.1 C37.1 R11.1 R43.1 U6.5 U10.6 U11.3 U15.1 U16.3
+5: C3.2 C4.2 C5.2 C6.2 C8.1 C18.1 D1.5 D2.5 D6.5 J2.1 J3.4 J6.4 R2.2 R3.2 R6.1 R7.2 R8.2 R9.2 R25.2 R42.1 U1.3 U5.2 U5.7 U5.14 U5.24 U5.34 U5.44 U7.4 | length 43.1
  Top Layer w0.45: C18.1@52.65,44.2 53.4,44.2 53.625,44.425 U7.4
  Top Layer w0.5: 13.85,20.45 D1.5 ; 16.95,28.4 U5.2 ; C6.2@17.4,30.95 v1(17.4,31.9) ; 18.55,30.95 U5.44 ; v1(22.7,18.15) U5.14 ; U5.34 32.8,30.95 v1(33.8,30.95) ; U5.24 32.3,22 ; v1(37.05,7.45) D6.5 ; v1(49,8.25) D2.5 ; v1(52.65,40.45) R7.2 ; C18.1 v1(52.65,42.55) R8.2 ; v1(60.45,45.1) R9.2
  Bottom Layer w0.5: v1(22.7,18.15) 22.7,20.15
  Bottom Layer w1: 22.7,20.15 23,20.15 v1(33.8,30.95)
  other v2: 55.4,10.45 58.35,10.45 56.15,11.65 57.6,11.65 8.45,29.75
+30V_ADJ: C16.1 C26.2 R13.2 R19.2 R20.2 R21.2 U2.8 U3.8 U7.1 U9.16 U9.22 U9.23 U9.24 U9.25 U9.26 U9.27 U9.28 U12.4 U13.4 U14.4 | length 41.5
  Top Layer w0.45: U9.16 46.275,45.675 v1(46.65,45.3) ; U3.8 49.225,26.825 49.54,26.51 C26.2 ; U2.8 51.675,33.875 51.99,33.56 C16.1 ; R19.2 54.45,50.41 U7.1
  Top Layer w0.5: C26.2 50.3,25.25 50.9,25.85 50.9,27.65 53.25,30 53.25,33.65 54.8,35.2 R21.2 ; 51.4,50 51.45,49.95
  Top Layer w0.6: 51.15,50.15 51.15,40.351 52.7,38.801 R20.2 R21.2
+36V: C2.1 C7.2 C9.2 C11.1 C15.1 C17.1 L1.2 R10.2 U1.1 U6.1 U6.2 U9.6 U9.7 U9.19 | length 3.3
  Top Layer w0.45: U9.19 46.825,47.625 v1(47.45,48.25) C11.1
  other v2: 3.4,53.6 4.75,53.6 6.1,53.6 3.4,54.8 4.75,54.8 6.1,54.8
CL_COMP: R15.2 R38.1 U2.7 | length 4.3
  Top Layer w0.3: R38.1 R15.2 48.7,33.85 49.375,34.525 U2.7
D+: D1.4 R5.1 U5.4 | length 11.5
  Top Layer w0.2: R5.1 10.15,24.5 10.775,25.125 11.225,25.125 D1.4@11.95,24.4 ; D1.4 D1.4@11.95,24.4 ; U5.4 18.35,26.8 18.15,27 16.5,27 14.625,25.125 12.675,25.125 D1.4@11.95,24.4
D-: D1.3 R4.1 U5.3 | length 11.5
  Top Layer w0.2: R4.1 10.15,26.15 10.775,25.525 11.225,25.525 D1.3@11.95,26.25 ; D1.3 D1.3@11.95,26.25 ; U5.3 18.35,27.6 18.15,27.4 16.334,27.4 14.459,25.525 12.575,25.525 11.95,26.15 D1.3@11.95,26.25
GND: C1.2 C2.2 C3.1 C4.1 C5.1 C6.1 C7.1 C8.2 C9.1 C10.2 C11.2 C12.1 C13.2 C14.2 C15.2 C16.2 C17.2 C18.2 C19.2 C20.2 C21.2 C22.2 C23.1 C24.2 C25.1 C26.1 C27.2 C28.2 C29.1 C30.2 C32.2 C33.2 C34.2 C36.2 C37.2 C40.1 C41.1 C42.2 C43.2 D1.2 D2.2 D4.2 D6.2 J2.5 J4.2 J5.3 LED3.2 LED7.2 Q1.3 Q2.3 R12.2 R14.1 R16.1 R17.1 R21.1 R26.1 SW1.A1 SW1.A2 SW2.A1 SW2.A2 U1.2 U2.4 U3.4 U4.1 U4.9 U5.5 U5.15 U5.23 U5.35 U5.43 U6.3 U7.3 U7.7 U8.2 U8.3 U8.6 U8.7 U9.1 U9.2 U9.3 U9.4 U9.5 U9.9 U9.20 U9.29 U10.2 U10.7 U10.9 U11.2 U15.3 U16.2 X2.2 X2.4 | length 28.1
  Top Layer w0.45: U9.20 46.325,48.275 v1(46.65,48.6) ; C28.2 51.39,31.24 v1(51.4,31.25) ; C18.2@52.65,45.3 53.4,45.3 53.625,45.075 U7.3 ; U3.4 v1(54.35,29.55) ; U2.4 R21.1
  Top Layer w0.5: D1.2 v1(12.9,27.65) ; C6.1@16.02,30.95 16.02,31.9 ; v1(18.1,26) U5.5 ; 21.1,15.4 X2.2 ; U5.43 21.9,32.25 ; U5.15 v1(23.5,22.3) ; v1(28.3,29.45) U5.35 ; v1(30.85,20.35) U5.23 ; D6.2 v1(40.6,9.2) ; v1(47.25,25.25) C26.1 ; C11.2 C21.2 49.74,44.06 v1(49.75,44.05) ; D2.2 v1(53.6,9.2) ; C18.2 v1(52.65,46.35) ; R26.1 v1(56.35,30.5) ; R21.1 v1(57.8,37.6)
  other v1: 1.1,1.1 7.6,1.1 33.6,1.1 40.1,1.1 46.6,1.1 53.1,1.1 59.6,1.1 66.1,1.1 72.6,1.1 80.5,1.1 14.1,1.6 20.6,1.6 27.1,1.6 18.2,6 1.1,7.1 7.6,7.1 66.1,7.1 80.5,7.1 27.1,7.6 19.8,8.2 2,8.3 74.7,8.3 17.4,9.2 20.65,9.65 16.55,10.7 14.1,10.8 28,12.65 1.1,13.1 40.6,13.1 46.6,13.1 80.5,13.1 20.6,15.9 32.2,16.15 16.55,16.5 1.1,19.1 80.5,19.1 25.4,20.95 29.35,20.95 20.85,21.3 16.45,23.3 29.35,24.7 1.1,25.1 80.5,25.1 20.85,25.25 25.6,25.25 29.35,28.25 21.9,29.45 15.57,29.65 1.1,31.1 7.1,31.1 80.5,31.1 30.1,31.8 1.1,37.1 80.5,37.1 80.5,43.1 1.1,49.1 80.5,49.1 1.1,55.9 7.6,55.9 14.1,55.9 18.2,55.9 80.5,55.9
  other v2: 56.05,13.05 57.35,13.05 74,16.05 75.25,16.05 56.05,16.25 57.35,16.25 72.85,16.65 56.05,18.25 57.35,18.25 52.2,19.45 53.45,19.45 52.2,20.65 53.45,20.65 56.05,21.75 57.35,21.75 60.6,21.75 56.05,22.95 57.35,22.95 60.6,22.95 61.85,22.95 72.85,26.85 74,27.45 10.95,28.5 74,28.65 72.85,29.25 61.85,33.15 61.85,35.55 72.85,39.45 74,40.05 74,41.25 72.85,41.85 1.3,42.15 5,42.35 5.15,44.7 6.4,44.7 61.85,45.75 5.15,46 6.4,46 61.85,48.15
LT3080_SET: Q1.1 R27.2 R30.2 U12.2 U13.2 U14.2 | length 77.9
  Top Layer w0.3: Q1.1 R30.2
  Top Layer w1: R27.2 v2(58.5,30.7)
  Bottom Layer w1: v2(58.5,30.7) 58.5,24.1 59,23.6 59,18.8 63.7,14.1 75.85,14.1 77.35,15.6 77.35,23.45 ; U13.2 75.95,48.65 77.35,47.25 77.35,36.05 ; U14.2 77.35,23.45 ; U12.2 77.35,36.05 ; 77.35,23.45 77.35,36.05
NetC1_1: C1.1 F1.2 L1.1 LED1.2 R1.2
NetC10_1: C10.1 J1.1
NetC13_1: C13.1 ENC1.2
NetC14_1: C14.1 J3.3
NetC19_1: C19.1 ENC2.2
NetC20_1: C20.1 U9.18 | length 3.2
  Top Layer w0.45: U9.18 47.325,46.975 47.65,46.65 C20.1
NetC21_1: C21.1 U9.17 U10.1 | length 5.6
  Top Layer w0.45: U9.17 46.875,46.325 48.15,45.05 C21.1 ; U10.1@48.435,43.1 C21.1@48.435,45.05
NetC28_1: C28.1 R38.2 U3.5 U5.36 | length 26.2
  Top Layer w0.3: U5.36 27.5,32.05 27.95,32.5 45.6,32.5 47.8,30.3 R38.2 ; U3.5 R38.2 ; C28.1 R38.2
NetC32_1: C32.1 J6.3
NetC33_1: C33.1 ENC1.1 U5.8 | length 26.1
  Top Layer w0.3: ENC1.1 17.4,10.3 ; 17.4,9.8 17.4,18.519 16.3,19.619 16.3,22.15 17.75,23.6 U5.8
NetC34_1: C34.1 ENC1.3 U5.9 | length 23.5
  Top Layer w0.3: ENC1.3 18.2,7.1 ; 18.2,6.6 18.2,18.85 17.1,19.95 17.1,21.95 17.95,22.8 U5.9
NetC42_1: C42.1 ENC2.1 U5.10 | length 21.8
  Top Layer w0.3: 19,5.6 19,19.181 17.9,20.281 17.9,21.65 18.25,22 U5.10 ; 19,6.1 ENC2.1
NetC43_1: C43.1 ENC2.3 U5.11 | length 20.8
  Top Layer w0.3: U5.11 19.35,20.05 19.8,19.6 19.8,8.8 ; 19.8,9.3 ENC2.3
NetF1_1: F1.1 U4.6
NetJ1_2: J1.2 U4.4
NetJ2_2: J2.2 R4.2 | length 3.3
  Top Layer w0.2: J2.2 6.35,25.65 6.475,25.525 7.525,25.525 8.15,26.15 R4.2
NetJ2_3: J2.3 R5.2 | length 3.3
  Top Layer w0.2: J2.3 6.35,25 6.475,25.125 7.525,25.125 8.15,24.5 R5.2
NetJ5_4: J5.4 R25.1
NetLED1_1: LED1.1 R1.1
NetLED2_1: LED2.1 R11.2
NetLED3_1: LED3.1 R42.2
NetLED7_1: LED7.1 R43.2
NetQ1_2: Q1.2 R34.2 | length 4
  Top Layer w0.3: Q1.2 R34.2
NetQ2_1: Q2.1 U5.1
NetQ2_2: Q2.2 R37.2 | length 3.6
  Top Layer w0.3: Q2.2 42.75,27.65 R37.2
NetR9_1: R9.1 U7.8 | length 1.5
  Top Layer w0.45: U7.8 58.425,46.375 R9.1
NetR10_1: R10.1 R14.2 U9.8
NetR12_1: R12.1 U8.1
NetR13_1: R13.1 R16.2 U9.12
NetR15_1: R15.1 R18.2 U2.6 | length 8.9
  Top Layer w0.3: R15.1 48.7,35.85 49.375,35.175 U2.6
  Top Layer w0.45: U2.6 52.125,35.175 v1(52.15,35.15) ; R18.2 v1(54.8,33.25)
  Bottom Layer w0.45: v1(52.15,35.15) 52.9,35.15 v1(54.8,33.25)
NetR17_2: R17.2 U9.15 | length 1.8
  Top Layer w0.45: U9.15 45.275,43.275 R17.2
NetR18_1: R18.1 U2.1 U2.2 | length 4.9
  Top Layer w0.45: R18.1 U2.1 57.925,33.875 58.1,34.05 58.1,34.35 57.925,34.525 U2.2
NetR22_2: R22.2 U12.3
NetR23_2: R23.2 U13.3
NetR24_2: R24.2 U14.3
NetR26_2: R26.2 R27.1 U3.2 | length 4.2
  Top Layer w0.45: U3.2 58.475,27.475 R27.1
NetR30_1: R30.1 U3.1 | length 6.6
  Top Layer w0.3: R30.1 49.45,22.95 53.325,26.825 U3.1
NetR32_1: R32.1 U3.6 | length 3.1
  Top Layer w0.3: R32.1 45.9,29.55 47.325,28.125 U3.6
NetR32_2: R32.2 U11.1 | length 0.3
  Top Layer w0.3: R32.2@44.227,29.277 R32.2@44.227,29.527
NetR34_1: R34.1 R37.1 U3.7 | length 4.5
  Top Layer w0.3: R34.1 R37.1 46.075,27.475 U3.7
NetSW1_2: SW1.B1 SW1.B2 U5.33
NetU3_3: U3.3 U16.1 | length 1.5
  Top Layer w0.45: v1(52.9,28.15) 52.925,28.125 U3.3
NetU5_42: U5.42 U11.6 U15.2 U16.6
PB4: LED2.2 U5.28
RESET: R6.2 SW2.B1 SW2.B2 U5.13
SCL: D2.4 D6.4 J3.2 J6.2 R3.1 R7.1 U5.18 U7.5 U10.5 U11.5 U16.5 | length 92.4
  Top Layer w0.2: U5.18 25.9,18.2 26.7,17.4 32.2,17.4 37.05,12.55 v1(37.05,11.7) D6.4 37.8,10.15 38.05,9.9 38.05,4.99 J6.2 ; v1(49,10.15) 50.8,10.15 51.05,9.9 51.05,4.99 J3.2 ; R3.1 50.05,20.699 54.651,25.3 59.201,25.3 60.35,26.449 60.35,42.5 58.425,44.425 U7.5 56.95,40.8 56.6,40.45 R7.1
  Bottom Layer w0.2: v1(37.05,11.7) 43.15,11.7 44.7,10.15 v1(49,10.15)
SDA: D2.3 D6.3 J3.1 J6.1 R2.1 R8.1 U5.19 U7.6 U10.4 U11.4 U16.4 | length 95.9
  Top Layer w0.2: U5.19 26.7,18.3 26.95,18.05 32.5,18.05 v1(39.55,11) D6.3 38.8,10.15 38.55,9.9 38.55,5.05 J6.1 ; R2.1 52.55,12.1 50.65,14 50.65,20.45 54.9,24.7 59.45,24.7 60.95,26.2 60.95,42.749 58.624,45.075 U7.6 56.025,45.075 55.7,44.75 R8.1 ; J3.1 51.55,5.05 51.55,9.9 51.8,10.15 v1(53.6,10.15)
  Bottom Layer w0.2: v1(39.55,11) 42.95,11 44.45,9.5 52.95,9.5 v1(53.6,10.15)
SUPPLY_OUT: C23.2 C25.2 C29.2 D4.1 J4.1 R22.1 R23.1 R24.1 U8.4
V_IN_LT: C24.1 C27.1 C30.1 R19.1 U2.3 U7.2 U12.5 U13.5 U14.5 | length 15.5
  Top Layer w0.45: U7.2 55.475,45.725 55.7,45.95 55.7,47.06 R19.1 ; U2.3 58.425,35.175 v1(58.45,35.2)
  Bottom Layer w0.5: v1(58.45,35.2) 60.25,37 64,37
XTAL1: C40.2 U5.17 X2.1 | length 6.4
  Top Layer w0.2: U5.17 25.1,16.35 26.05,15.4 28,15.4
XTAL2: C41.2 U5.16 X2.3 | length 7.2
  Top Layer w0.2: X2.3 22.55,13.1 24.3,14.85 U5.16
pads on no net: D1.1 D2.1 D6.1 J2.4 J2.6 J2.7 J2.8 J2.9 J2.10 J2.11 J5.1 J5.2 R20.1 SW1.G1 SW2.G1 U2.5 U4.2 U4.3 U4.5 U4.7 U4.8 U5.6 U5.12 U5.20 U5.21 U5.22 U5.25 U5.26 U5.27 U5.29 U5.30 U5.31 U5.32 U5.37 U5.38 U5.39 U5.40 U5.41 U6.4 U8.5 U8.8 U9.10 U9.11 U9.13 U9.14 U9.21 U10.3 U10.8 U12.1 U13.1 U14.1
copper on no net: | length 1.8
  Top Layer w0.45: 50.7,35.825 50.7,37.6

## Keep-outs
Keep-Out Layer:
  the board outline again, w0.1

## Other copper
Top Layer:
  rectangle: 1.8,27.4 5.9,29.15
  rectangle: 1.8,20.85 3.7,29.15
  rectangle: 1.8,20.85 5.9,22.6
  region net NetJ5_4: 58.2,8.55 57.85,8.9 55.1,8.9 54.75,8.55 54.75,3.15 55.1,2.8 57.85,2.8 58.2,3.15
  region net +5: 55.15,9.95 54.9,10.2 54.9,12.15 58.6,12.15 58.85,11.9 58.85,10.2 58.6,9.95
  region net +30V_ADJ: 44.55,49.35 56.15,49.35 56.5,49.7 56.5,54.65 55.85,55.3 45.7,55.3 44.55,54.15
  region net NetR12_1: 55.15,13.7 55.15,16.4 54.8,16.75 52.1,16.75 52.1,14.05 52.45,13.7
  region net SUPPLY_OUT: 58.25,13.55 58.25,15.95 58.55,16.25 62.5,16.25 63.2,16.95 63.2,11.2 61.15,13.25 58.55,13.25
  region net +30V_ADJ: 56.15,49.35 56.5,49.7 56.5,52.15 57.05,52.7 75.2,52.7 76.1,51.8 76.1,47.05 75.45,46.4 73.5,46.4 73,45.9 73,44 73.5,43.5 75.45,43.5 76.1,42.85 76.1,34.4 75.5,33.8 73.5,33.8 73,33.3 73,31.35 73.5,30.85 75.4,30.85 76.1,30.15 76.1,21.9 75.4,21.2 73.5,21.2 73,20.7 73,18.7 73.5,18.2 77.5,18.2 79,19.7 79,53.85 77.55,55.3 53.9,55.3 52.7,54.1 52.7,49.7 53.05,49.35
  region net V_IN_LT: 67.655,44.3 67.905,44.55 71.505,44.55 71.755,44.3 71.755,40.15 67.895,40.15 67.655,40.39
  region net V_IN_LT: 67.66,19.1 67.91,19.35 71.51,19.35 71.76,19.1 71.76,14.95 67.9,14.95 67.66,15.19
  region net V_IN_LT: 67.66,31.7 67.91,31.95 71.51,31.95 71.76,31.7 71.76,27.55 67.9,27.55 67.66,27.79
  region net NetR24_2: 67.655,23.35 67.905,23.6 71.505,23.6 71.755,23.35 71.755,20.2 71.505,19.95 67.905,19.95 67.655,20.2
  region net NetR22_2: 67.655,35.95 67.905,36.2 71.505,36.2 71.755,35.95 71.755,32.8 71.505,32.55 67.905,32.55 67.655,32.8
  region net SUPPLY_OUT: 62.95,48.55 62.95,11.45 65.85,8.55 72.95,8.55 74.1,9.7 74.1,12.6 72.95,13.75 67.85,13.75 66.95,14.65 66.95,48.55 66.7,48.8 63.2,48.8
  region net NetF1_1: 3.25,42.675 3.25,43.625 3.125,43.75 2.475,43.75 2.25,43.975 2.25,45.175 4.3,45.175 4.3,44 4.05,43.75 3.675,43.75 3.55,43.625 3.55,42.675
  region net NetR23_2: 67.65,48.55 67.9,48.8 71.5,48.8 71.75,48.55 71.75,45.4 71.5,45.15 67.9,45.15 67.65,45.4
  region net +5: 8.05,28 7.95,28.1 7.95,30 8.2,30.25 8.7,30.25 8.95,30 8.95,28
  region net +5: 4.75,26.1 4.75,26.7 4.9,26.85 5.85,26.85 8,29 8.85,29 8.85,28 8.1,28 6.2,26.1
  pour cut-out: 21.7,15.95 26.9,15.95 26.9,12.55 21.7,12.55
Bottom Layer:
  region net V_IN_LT: 65.65,53.6 67.65,51.6 67.65,45.4 67.9,45.15 71.5,45.15 71.75,44.9 71.75,41.55 71.5,41.3 67.95,41.3 67.65,41 67.65,32.8 67.9,32.55 71.5,32.55 71.75,32.3 71.75,29 71.5,28.75 67.9,28.75 67.65,28.5 67.65,20.2 67.9,19.95 71.5,19.95 71.75,19.7 71.75,16.4 71.5,16.15 65.45,16.15 63.65,17.95 63.65,48.65 63.05,49.25 58.15,49.25 57.75,49.65 57.75,53.2 58.15,53.6
  pour cut-out: 21.7,15.95 26.9,15.95 26.9,12.55 21.7,12.55
  region net +5: 26.95,19.9 25.383,19.9 24.7,20.583 24.7,21.6 23.8,20.7 23.8,20.3 24.5,19.6 26.8,19.6 26.95,19.75

## Silkscreen, mask and mechanical layers (free items; w line width, h text height)
Top Solder:
  the board outline again, w1
Bottom Solder:
  the board outline again, w1
Mechanical 1:
  the board outline again, w0.1